# Altium PCB USB-RS232.PcbDoc
Units mm, origin at the board's own origin, x right, y up, seen from the top; angles counter-clockwise.
Board outline 42 x 27 mm, 2 copper layers (Top Layer, Bottom Layer); 20 components, 32 nets, 101 pads, 24 vias.
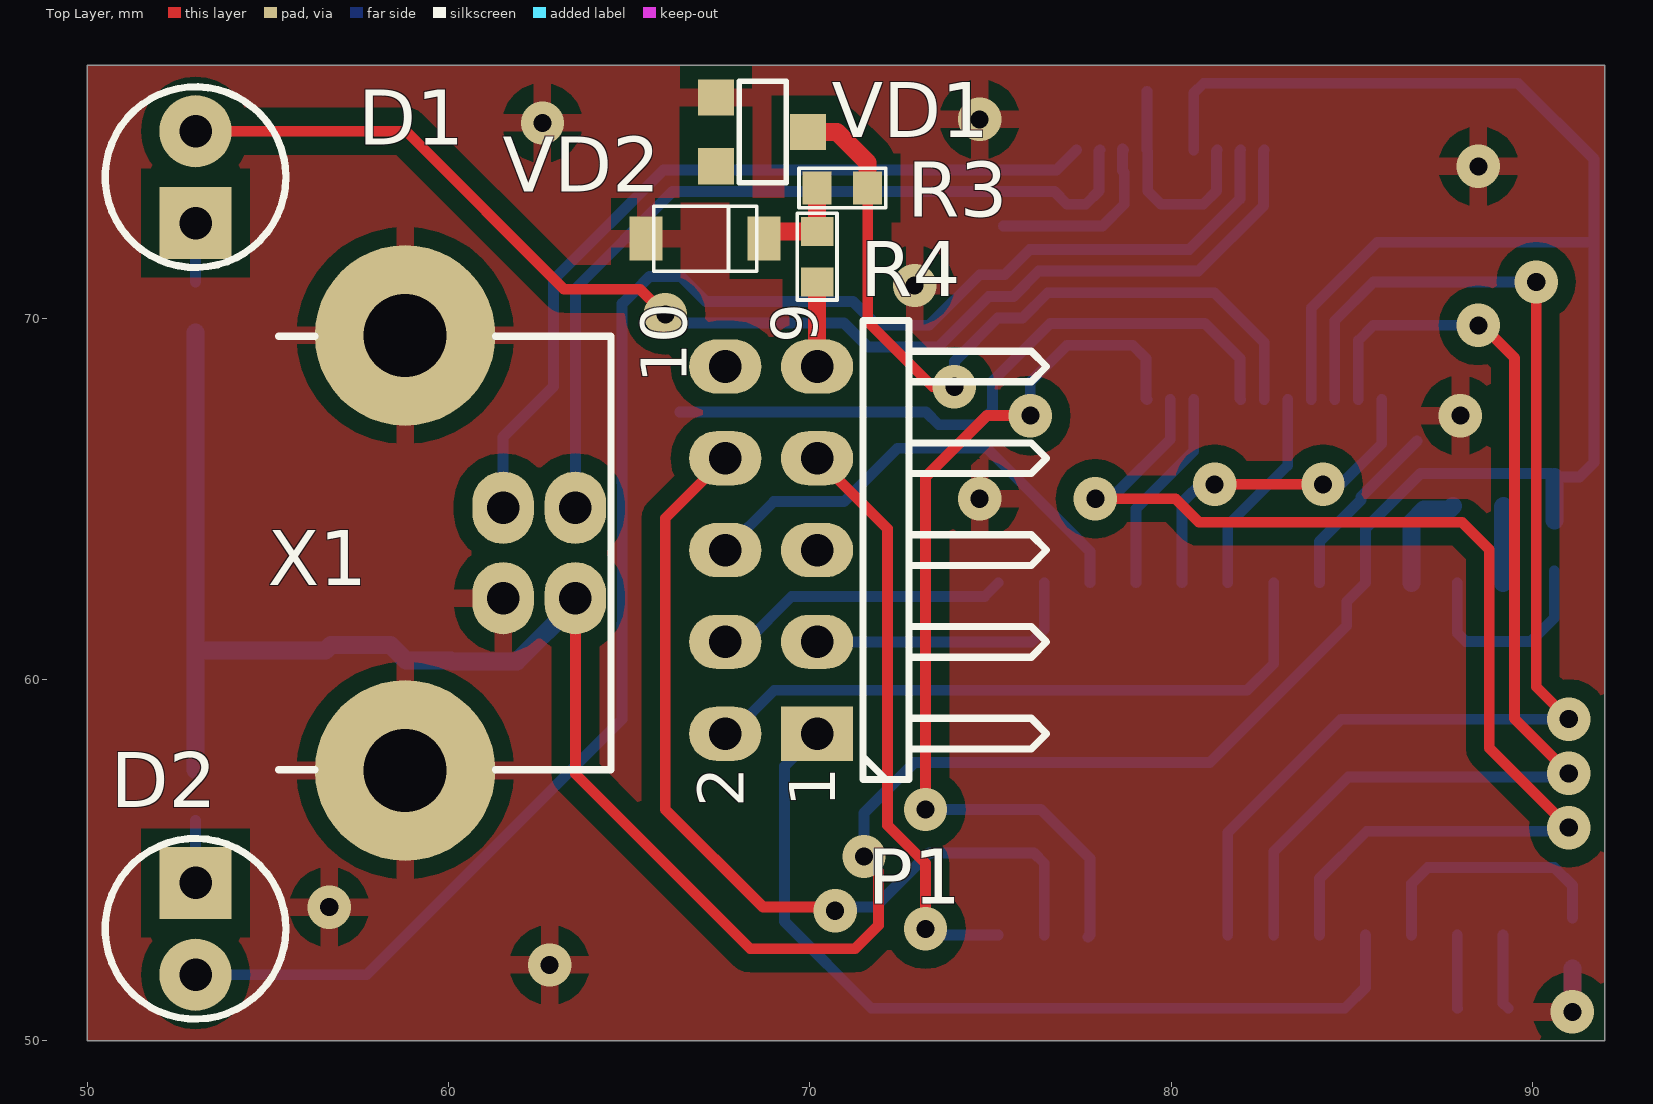
[diagram p0: Top Layer view]
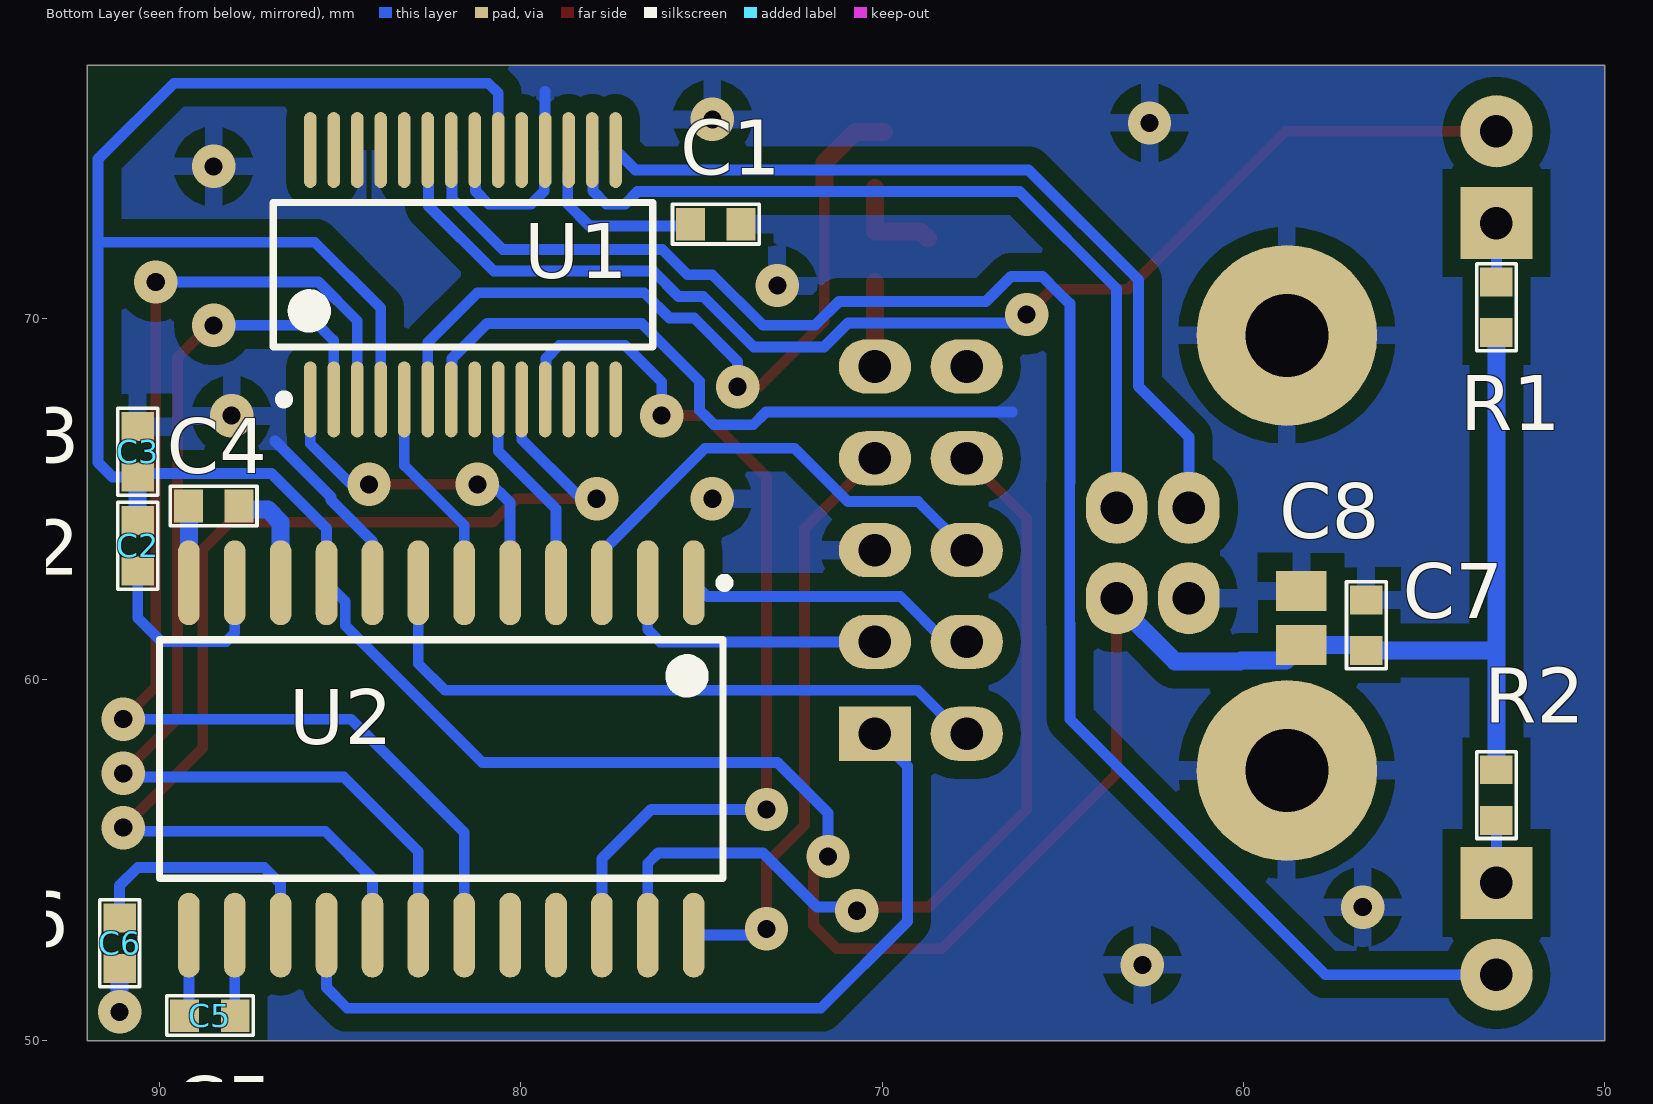
[diagram p1: Bottom Layer view, seen from below]

## Layer stack, top to bottom
Top Layer: signal copper 0.0356
Dielectric: dielectric 0.32, FR-4, Dk 4.8
Bottom Layer: signal copper 0.0356

## Board outline
50,50 50,77 92,77 92,50 50,50

## Design rules (kind name [scope] priority, off if disabled: settings)
Clearance "Clearance_GND_VCC +3.3" [InNet('GND') vs InNet('VCC +3.3')] p1 off: gap=0.2
Clearance Clearance_U3_Trace [(IsTrack  And IsNet)  And InRegion(3815,3770 ,4275 ,4280) vs (IsTrack  And IsNet)  And InRegion(3815,3770 ,4275 ,4280)] p2 off: gap=0.2
Clearance Clearance_QFP_NET [InNet('SPI_MISO/DO','SPI_MOSI/DI','GND','VCC','GDO2','GDO0','SPI_SS','SPI_SCK','NetC3_1','NetC2_1','GND','NetC1_2','NetANT1_1','NetR1_2')  And InRegion(3815,3770 ,4275 ,4280) vs InNet('SPI_MISO','SPI_MOSI','GND','VCC','GDO2','GDO0','SPI_SS','SPI_SCK','NetC3_1','NetC2_1','GND')  And InRegion(3815,3770 ,4275 ,4280)] p3 off: gap=0.2
Clearance Clearance_QFP_Pins [InComponent('U1') And IsPad] p4 off: gap=0.2
Clearance Clearance_GND [InPolygon] p5: gap=0.5
Clearance [All] p6: gap=0.3
ComponentClearance ComponentClearance_R1_C10 [InComponent('C10') vs InComponent('R1')] p1 off: gap=0 collisioncheckmode=3 verticalgap=0 showdistances=FALSE
ComponentClearance [All] p2 off: gap=0.3 collisioncheckmode=3 verticalgap=0.3 showdistances=FALSE
HoleSize [All] p1: absolutevalues=TRUE maxlimit=5 minlimit=0.3 maxpercent=80.000 minpercent=20.000
NetAntennae [All] p1: netantennaetolerance=50
PlaneConnect [All] p1: planeconnectstyle=Relief reliefexpansion=0.508 reliefentries=4 reliefconductorwidth=0.3 reliefairgap=0.3
PolygonConnect [All] p1: connectstyle=Relief reliefconductorwidth=0.5 reliefentries=4 polygonreliefangle="90 Angle"
RoutingCorners [All] p1: cornerstyle=45-Degree minsetback=2.54 maxsetback=5
RoutingVias [All] p1: holewidth=0.5 width=1.6 viastyle="Through Hole" minholewidth=0.3 minwidth=1 maxholewidth=1 maxwidth=2
ShortCircuit ShortCircuit_ANT1 [InComponent('ANT1')] p1: allowed=TRUE
ShortCircuit [All] p2: allowed=FALSE
SilkToSilkClearance [All] p1: silktosilkclearance=0.3
SilkscreenOverComponentPads [All] p1: minsilkscreentomaskgap=0.254
SolderMaskExpansion [All] p1: expansion=0.102
Width [All] p1: maxlimit=5 minlimit=0.2 preferedwidth=0.3
20 further rules are at their usual default settings.

## Components (designator, comment, footprint, x,y, rotation, side; value= is the part's Value field where it differs from the comment)
C1 "CAP_SMD" C0603 74.6,72.6 r0 bottom
C2 "CAP_SMD" C0603 90.6,63.7 r270 bottom
C3 "CAP_SMD" C0603 90.6,66.3 r270 bottom
C4 "CAP_SMD" C0603 88.5,64.8 r180 bottom
C5 "CAP_SMD" C0603 88.6,50.7 r0 bottom
C6 "CAP_SMD" C0603 91.1,52.7 r270 bottom
C7 "CAP_SMD" C0603 56.6,61.5 r90 bottom
C8 "CAP_SMD" C0805 58.4,61.7 r90 bottom
D1 "LED-BLUE" LED 53,73.9 r90 top locked
D2 "LED-GREEN" LED 53,53.1 r270 top locked
P1 "Header 5X2H" HDR2X5H 70.2,58.5 r90 top
R1 "RES_SMD" C0603 53,70.3 r270 bottom
R2 "RES_SMD" C0603 53,56.8 r90 bottom
R3 "RES_SMD" C0603 70.9,73.6 r180 top
R4 "RES_SMD" C0603 70.2,71.7 r270 top
U1 "FT232RL" SSOP-28_N 81.6,71.2 r90 bottom
U2 "ADM208E" SOIC-24 82.2,57.8 r270 bottom
VD1 "BZX84C5V1" SOT23 67.4,76.1 r270 top
VD2 "MBR054" SOD-123 67.1,72.2 r180 top
X1 "USB Connector" USBB-1J 58.8,63.5 r270 top

## Footprints (in the part's own frame and the unit in brackets; to place one, negate y for a bottom-side part, rotate by r counter-clockwise, add the part's x,y. Pads: shape width x height; smd on the part's side, far side on the other; paste and mask are expansions set on the pad)
C0603 [mm]
  rect 0.8x0.9 smd: 1(-0.7,0) 2(0.7,0)
  silkscreen extent -1.2,-0.55 1.2,0.55, body extent -0.87,-0.48 0.87,0.48, height 1.3
C0805 [mm] "Chip Capacitor, Body 2.0x1.3mm, IPC High Density"
  rect 1.1x1.4 smd: 1(-0.75,0) 2(0.75,0)
  body extent -1.1,-0.72 1.1,0.72, height 1.4
HDR2X5H [mm] "Connector; Header; 5x2 Position; Right Angle"
  rect 1.5x2 hole 0.9: 1(0,0)
  oval 1.5x2 hole 0.9: 2(0,2.54) 3(2.54,0) 4(2.54,2.54) 5(5.08,0) 6(5.08,2.54) 7(7.62,0) 8(7.62,2.54) 9(10.16,0) 10(10.16,2.54)
  silkscreen extent -1.27,-6.35 11.43,-1.27
LED [mm] "LED d 5mm"
  rect 2x2 hole 0.9: 1(-1.27,0)
  round 2 hole 0.9: 2(1.27,0)
  silkscreen extent -2.5,-2.5 2.5,2.5
SOD-123 [mm]
  rect 0.91x1.22 smd: 1(-1.635,0) 2(1.635,0)
  silkscreen extent -1.43,-0.9 1.43,0.9
SOIC-24 [mm] "SOIC, 24-Leads, Body 15,6x7,6mm (max), Pitch 1,27mm, IPC Medium Density"
  oval 2.35x0.6 smd: 1(-4.875,6.985) 2(-4.875,5.715) 3(-4.875,4.445) 4(-4.875,3.175) 5(-4.875,1.905) 6(-4.875,0.635) 7(-4.875,-0.635) 8(-4.875,-1.905) 9(-4.875,-3.175) 10(-4.875,-4.445) 11(-4.875,-5.715) 12(-4.875,-6.985) 13(4.875,-6.985) 14(4.875,-5.715) 15(4.875,-4.445) 16(4.875,-3.175) 17(4.875,-1.905) 18(4.875,-0.635) 19(4.875,0.635) 20(4.875,1.905) 21(4.875,3.175) 22(4.875,4.445) 23(4.875,5.715) 24(4.875,6.985)
  silkscreen extent -5,-7.8 3.3,7.96, body extent -3.8,-7.8 3.8,7.8, height 2.65
SOT23 [mm]
  rect 1x1 smd: 1(0,0) 2(1.9,0) 3(0.95,2.55)
  silkscreen extent -0.45,0.65 2.35,1.95
SSOP-28_N [mm] "SOP, 28-Leads, Body 10.2x5.3mm, Pitch 0.65mm, IPC Medium Density"
  oval 2.1x0.35 smd: 1(-3.45,4.225) 2(-3.45,3.575) 3(-3.45,2.925) 4(-3.45,2.275) 5(-3.45,1.625) 6(-3.45,0.975) 7(-3.45,0.325) 8(-3.45,-0.325) 9(-3.45,-0.975) 10(-3.45,-1.625) 11(-3.45,-2.275) 12(-3.45,-2.925) 13(-3.45,-3.575) 14(-3.45,-4.225) 15(3.45,-4.225) 16(3.45,-3.575) 17(3.45,-2.925) 18(3.45,-2.275) 19(3.45,-1.625) 20(3.45,-0.975) 21(3.45,-0.325) 22(3.45,0.325) 23(3.45,0.975) 24(3.45,1.625) 25(3.45,2.275) 26(3.45,2.925) 27(3.45,3.575) 28(3.45,4.225)
  silkscreen extent -3.57,-5.25 2,5.25, body extent -2.8,-5.25 2.8,5.25, height 2
USBB-1J [mm] "USB-B Female Connector"
  oval 2x1.7 hole 0.9: 1(1.25,4.71) 2(-1.25,4.71) 3(-1.25,2.71) 4(1.25,2.71)
  round 5 hole 2.3: 5(-6.02,0) 5(6.02,0)
  silkscreen extent -6,-3.5 6,5.7

## Part data
C1 C2 C3 C4 C5 C6 C7 C8: library part Capasitor_SMD_0805, "Capasitor_SMD_0808/"
D1 D2: library part LED
P1: "Header, 5-Pin, Dual row, Right Angle"
R1 R2 R3 R4: library part RES, "Resistor"
U1: library part FT232RL-Reel, "USB UART Asynchronous Serial Data Transfer Chip, SSOP-28, Tape and Reel"
VD1: library part BZX84C, "BZX84C"

## Via types
v1: diameter 1.2, hole 0.5, Top Layer to Bottom Layer, 24 vias

## Nets (pads, with @x,y where several pads share a name; then routed paths per layer and width w, separated by ;. In a path a pad name is that pad's centre, name@x,y a point inside that pad or via, vN(x,y) a via of type N, cw(c..) or ccw(c..) an arc to the next point about the centre after c; other vN are vias at no path point)
#CTS: U1.11 U2.22 | length 26
  Top Layer w0.3: v1(73.2,56.4) 73.2,65.6 74.9,67.3 v1(76.1,67.3)
  Bottom Layer w0.3: v1(73.2,56.4) 76.4,56.4 77.755,55.045 U2.22 U2.22@77.7,52.87 ; v1(76.1,67.3) 76.1,68.234 77.116,69.25 78.934,69.25 79.3,68.884 79.3,67.775 U1.11
#DCD: U1.10 U2.17 | length 33
  Top Layer w0.3: v1(77.9,65) 80.115,65 80.765,64.35 88.05,64.35 88.8,63.6 88.8,58.1 v1(91,55.9)
  Bottom Layer w0.3: v1(77.9,65) 78,65.1 78.434,65.1 79.975,66.641 U1.10 ; U2.17 84.105,54.495 85.41,55.8 90.9,55.8 v1(91,55.9)
#DSR: U1.9 U2.4 | length 5.7
  Bottom Layer w0.3: U2.4 79.025,64.725 80.625,66.325 U1.9
#DTR: U1.2 U2.18 | length 30.1
  Top Layer w0.3: v1(88.5,69.8) 88.6,69.8 89.5,68.9 89.5,58.915 91,57.415 v1(91,57.4)
  Bottom Layer w0.3: U2.18 82.835,55.235 84.9,57.3 91,57.3 v1(91,57.4) ; U1.2 85.175,69.375 85.6,69.8 v1(88.5,69.8)
#RI: R3.1 U1.6 VD1.3 | length 21.8
  Top Layer w0.3: R3.1 71.6,69.9 73.4,68.1 v1(74,68.1)
  Top Layer w0.5: VD1.3 70.75,75.15 71.6,74.3 R3.1
  Bottom Layer w0.3: v1(74,68.1) 74,68.8 75.2,70 75.883,70 76.583,70.7 81.2,70.7 82.575,69.325 U1.6
#RTS: U1.3 U2.19 | length 34.2
  Top Layer w0.3: v1(90.1,71) 90.1,59.8 v1(91,58.9)
  Bottom Layer w0.3: U2.19 81.565,55.765 84.7,58.9 v1(91,58.9) ; U1.3 84.525,69.925 85.6,71 v1(90.1,71)
#RXD: U1.5 U2.6 | length 5.8
  Bottom Layer w0.3: U2.6 81.565,64.265 83.225,65.925 U1.5
#TXD: U1.1 U2.5 | length 10.1
  Top Layer w0.3: v1(81.2,65.4) 81,65.4 v1(84.2,65.4)
  Bottom Layer w0.3: U2.5 80.295,64.895 80.9,65.5 81,65.4 v1(81.2,65.4) ; v1(84.2,65.4) 84.7,65.4 85.825,66.525 U1.1
CTS: P1.8 U2.23 | length 24.8
  Top Layer w0.3: P1.8 66,64.46 66,56.4 68.7,53.7 v1@70.7,53.7
  Bottom Layer w0.3: v1(70.7,53.6) 70.8,53.7 71.8,53.7 73.3,55.2 76.2,55.2 76.485,54.915 U2.23
DCD: P1.1 U2.16 | length 24.3
  Bottom Layer w0.3: P1.1 69.3,57.6 69.3,53.3 71.7,50.9 84.8,50.9 85.375,51.475 U2.16
DSR: P1.6 U2.3 | length 13.3
  Bottom Layer w0.3: P1.6 69,64.92 70.947,64.92 72.427,66.4 74.9,66.4 77.755,63.545 U2.3
DTR: P1.4 U2.1 | length 8.2
  Bottom Layer w0.3: P1.4 68.24,61.04 69.5,62.3 74.84,62.3 U2.1
GND: C1.1 C3.1 C6.2 C7.2 C8.2 P1.5 U1.7 U1.18 U1.21 U1.25 U1.26 U2.8 VD1.1 VD2.2 X1.4 X1.5 | length 31.2
  Bottom Layer w0.3: 66.4,67.4 73.215,67.4 73.565,67.05 74.65,67.05 75.05,67.45 75.05,68.25 76.65,69.85 80.934,69.85 81.9,68.884 81.9,67.775 U1.7 ; 79.325,76.275 U1.18 79.35,74.625 79.35,73.516 79.716,73.15 80.884,73.15 81.25,73.516 81.25,74.625 U1.21 ; U2.8 84.105,63.82 85.25,64.965 85.25,65.05 86.8,66.6
  Bottom Layer w0.5: v1(91.1,50.8) C6.2
  other v1: 62.8,52.1 56.7,53.7 74.7,65 88,67.3 72.9,70.9 88.5,74.2 62.6,75.4 74.7,75.5
NetC1_2: C1.2 U1.17 | length 5.2
  Bottom Layer w0.3: C1.2@75.35,72.55 78.099,72.55 78.7,73.151 78.7,74.032 78.65,74.082 78.65,74.625 U1.17 U1.17@78.65,74.675
NetC2_2: C2.2 U2.11 | length 5.7
  Bottom Layer w0.3: U2.11 87.915,61.285 88.15,61.05 89.95,61.05 90.6,61.7 C2.2
NetC4_1: C4.1 U2.12 | length 2.1
  Bottom Layer w0.5: U2.12 89.185,64.785 C4.1
NetC4_2: C4.2 U2.10 | length 3
  Bottom Layer w0.5: U2.10 86.645,64.345 87,64.7 87.7,64.7 C4.2
NetC5_1: C5.1 U2.14 | length 2
  Bottom Layer w0.3: U2.14 87.915,50.911 C5.1@87.926,50.9
NetC5_2: C5.2 U2.13 | length 2.1
  Bottom Layer w0.3: U2.13 89.185,51.041 C5.2@89.326,50.9
NetC6_1: C6.1 U2.15 | length 7.2
  Bottom Layer w0.3: U2.15 86.645,54.345 87.1,54.8 90.6,54.8 91.1,54.3 C6.1
NetD1_1: D1.1 R1.1 | length 1.6
  Bottom Layer w0.3: R1.1 D1.1
NetD2_1: D2.1 R2.1 | length 1.7
  Bottom Layer w0.3: D2.1 R2.1
NetR3_2: R3.2 R4.1 VD2.1 | length 2.7
  Top Layer w0.5: VD2.1 68.935,72.4 R4.1 R3.2
NetU1_15: U1.15 X1.3 | length 22.8
  Bottom Layer w0.3: X1.3 61.51,66.71 62.91,68.11 62.91,71.059 65.951,74.1 76.825,74.1 U1.15
NetU1_16: U1.16 X1.2 | length 23.1
  Bottom Layer w0.3: X1.2 63.51,70.81 66.2,73.5 76.766,73.5 77.116,73.15 77.634,73.15 78,73.516 78,74.625 U1.16
RI: P1.9 R4.2 | length 2.3
  Top Layer w0.5: P1.9 R4.2
RTS: P1.7 U2.24 | length 16.4
  Top Layer w0.3: P1.7 72.15,64.17 72.15,55.965 73.2,54.915 v1(73.2,53.1)
  Bottom Layer w0.3: v1(73.2,53.1) 73.375,52.925 U2.24
RXD: P1.2 U2.7 | length 18.2
  Bottom Layer w0.3: P1.2 67.814,58.5 69.014,59.7 82.1,59.7 82.835,60.435 U2.7
RXLED#: D2.2 U1.22 | length 47
  Bottom Layer w0.3: D2.2 57.73,51.83 64.8,58.9 64.8,61.542 64.81,61.552 64.81,65.438 64.8,65.448 64.8,70.4 64.815,70.4 65.158,70.742 65.565,71.15 66.435,71.15 67.125,70.46 71.196,70.46 71.856,69.8 73.3,69.8 74.7,71.2 75.386,71.2 76.086,71.9 80.5,71.9 81.9,73.3 81.9,74.625 U1.22
TXD: P1.3 U2.2 | length 7.7
  Bottom Layer w0.3: P1.3 76.14,61.04 76.485,61.385 U2.2
TXLED#: D1.2 U1.23 | length 35.3
  Top Layer w0.3: D1.2 58.83,75.17 63.2,70.8 65.3,70.8 v1(66,70.1)
  Bottom Layer w0.3: v1(66,70.1) 66,70.2 66.34,69.86 70.947,69.86 71.607,69.2 73.551,69.2 74.951,70.6 75.635,70.6 76.335,71.3 80.749,71.3 82.55,73.101 82.55,74.625 U1.23
VCC: C2.1 C3.2 C7.1 C8.1 R1.2 R2.2 U1.4 U1.20 U2.9 X1.1 | length 102.5
  Top Layer w0.3: X1.1 63.51,57.39 68.35,52.55 71.25,52.55 71.9,53.2 71.9,54.7 v1(71.5,55.1) v1@71.6,55.1
  Bottom Layer w0.3: v1(71.5,55.1) 71.5,56.3 72.9,57.7 81.066,57.7 84.855,61.489 84.855,62.155 U2.9 85.375,64.175 86.9,65.7 90.5,65.7 C3.2 91.3,65.6 91.7,66 91.7,72.1 ; U1.20 80.625,76.225 80.9,76.5 89.6,76.5 91.7,74.4 91.7,72.1 ; U1.4 83.875,70.275 85.7,72.1 91.7,72.1
  Bottom Layer w0.5: R2.2 53,60.9 ; R1.2 53,60.9 ; X1.1 63.51,62.12 61.89,60.5 60.093,60.5 60.063,60.53 58.82,60.53 C8.1 56.75,60.95 C7.1 53.1,60.8 53,60.9 ; C2.1 C3.2
pads on no net: P1.10 U1.8 U1.12 U1.13 U1.14 U1.19 U1.24 U1.27 U1.28 U2.20 U2.21 VD1.2

## Polygon pours and split planes (outlines as drawn)
GND on Top Layer "TOP" (solid, remove dead copper, pour order 2): 50,77 92,77 92,50 50,50
GND on Bottom Layer "BOT" (solid, remove dead copper, pour order 4): 50,77 92,77 92,50 50,50

## Silkscreen, mask and mechanical layers (free items; w line width, h text height)
Mechanical 1:
  the board outline again, w0.1

## Dimensions
50,77 to 92,77 on Mechanical 13
92,77 to 92,50 on Mechanical 13

## Text inside footprints (layer, text, board x,y; h text height)
P1: Top Overlay "2" at 68.168,56.468 h1.27 r90; Top Overlay "1" at 70.708,56.468 h1.27 r90; Top Overlay "9" at 70.2,69.3 h1.27 r90; Top Overlay "10" at 66.6,68.2 h1.27 r90